# Altium PCB Rackmount_DSP.PcbDoc (part 3 of 24)
Units mil, origin at the board's own origin, x right, y up, seen from the top; angles counter-clockwise.
Board outline 10629.92 x 8267.72 mil, 4 copper layers (Top Layer, Mid Layer 1, Mid Layer 2, Bottom Layer), stack 36.2 mil thick; 4500 components, 1565 nets, 9765 pads, 3289 vias.
Unrouted connection lines stored in the file: 1.
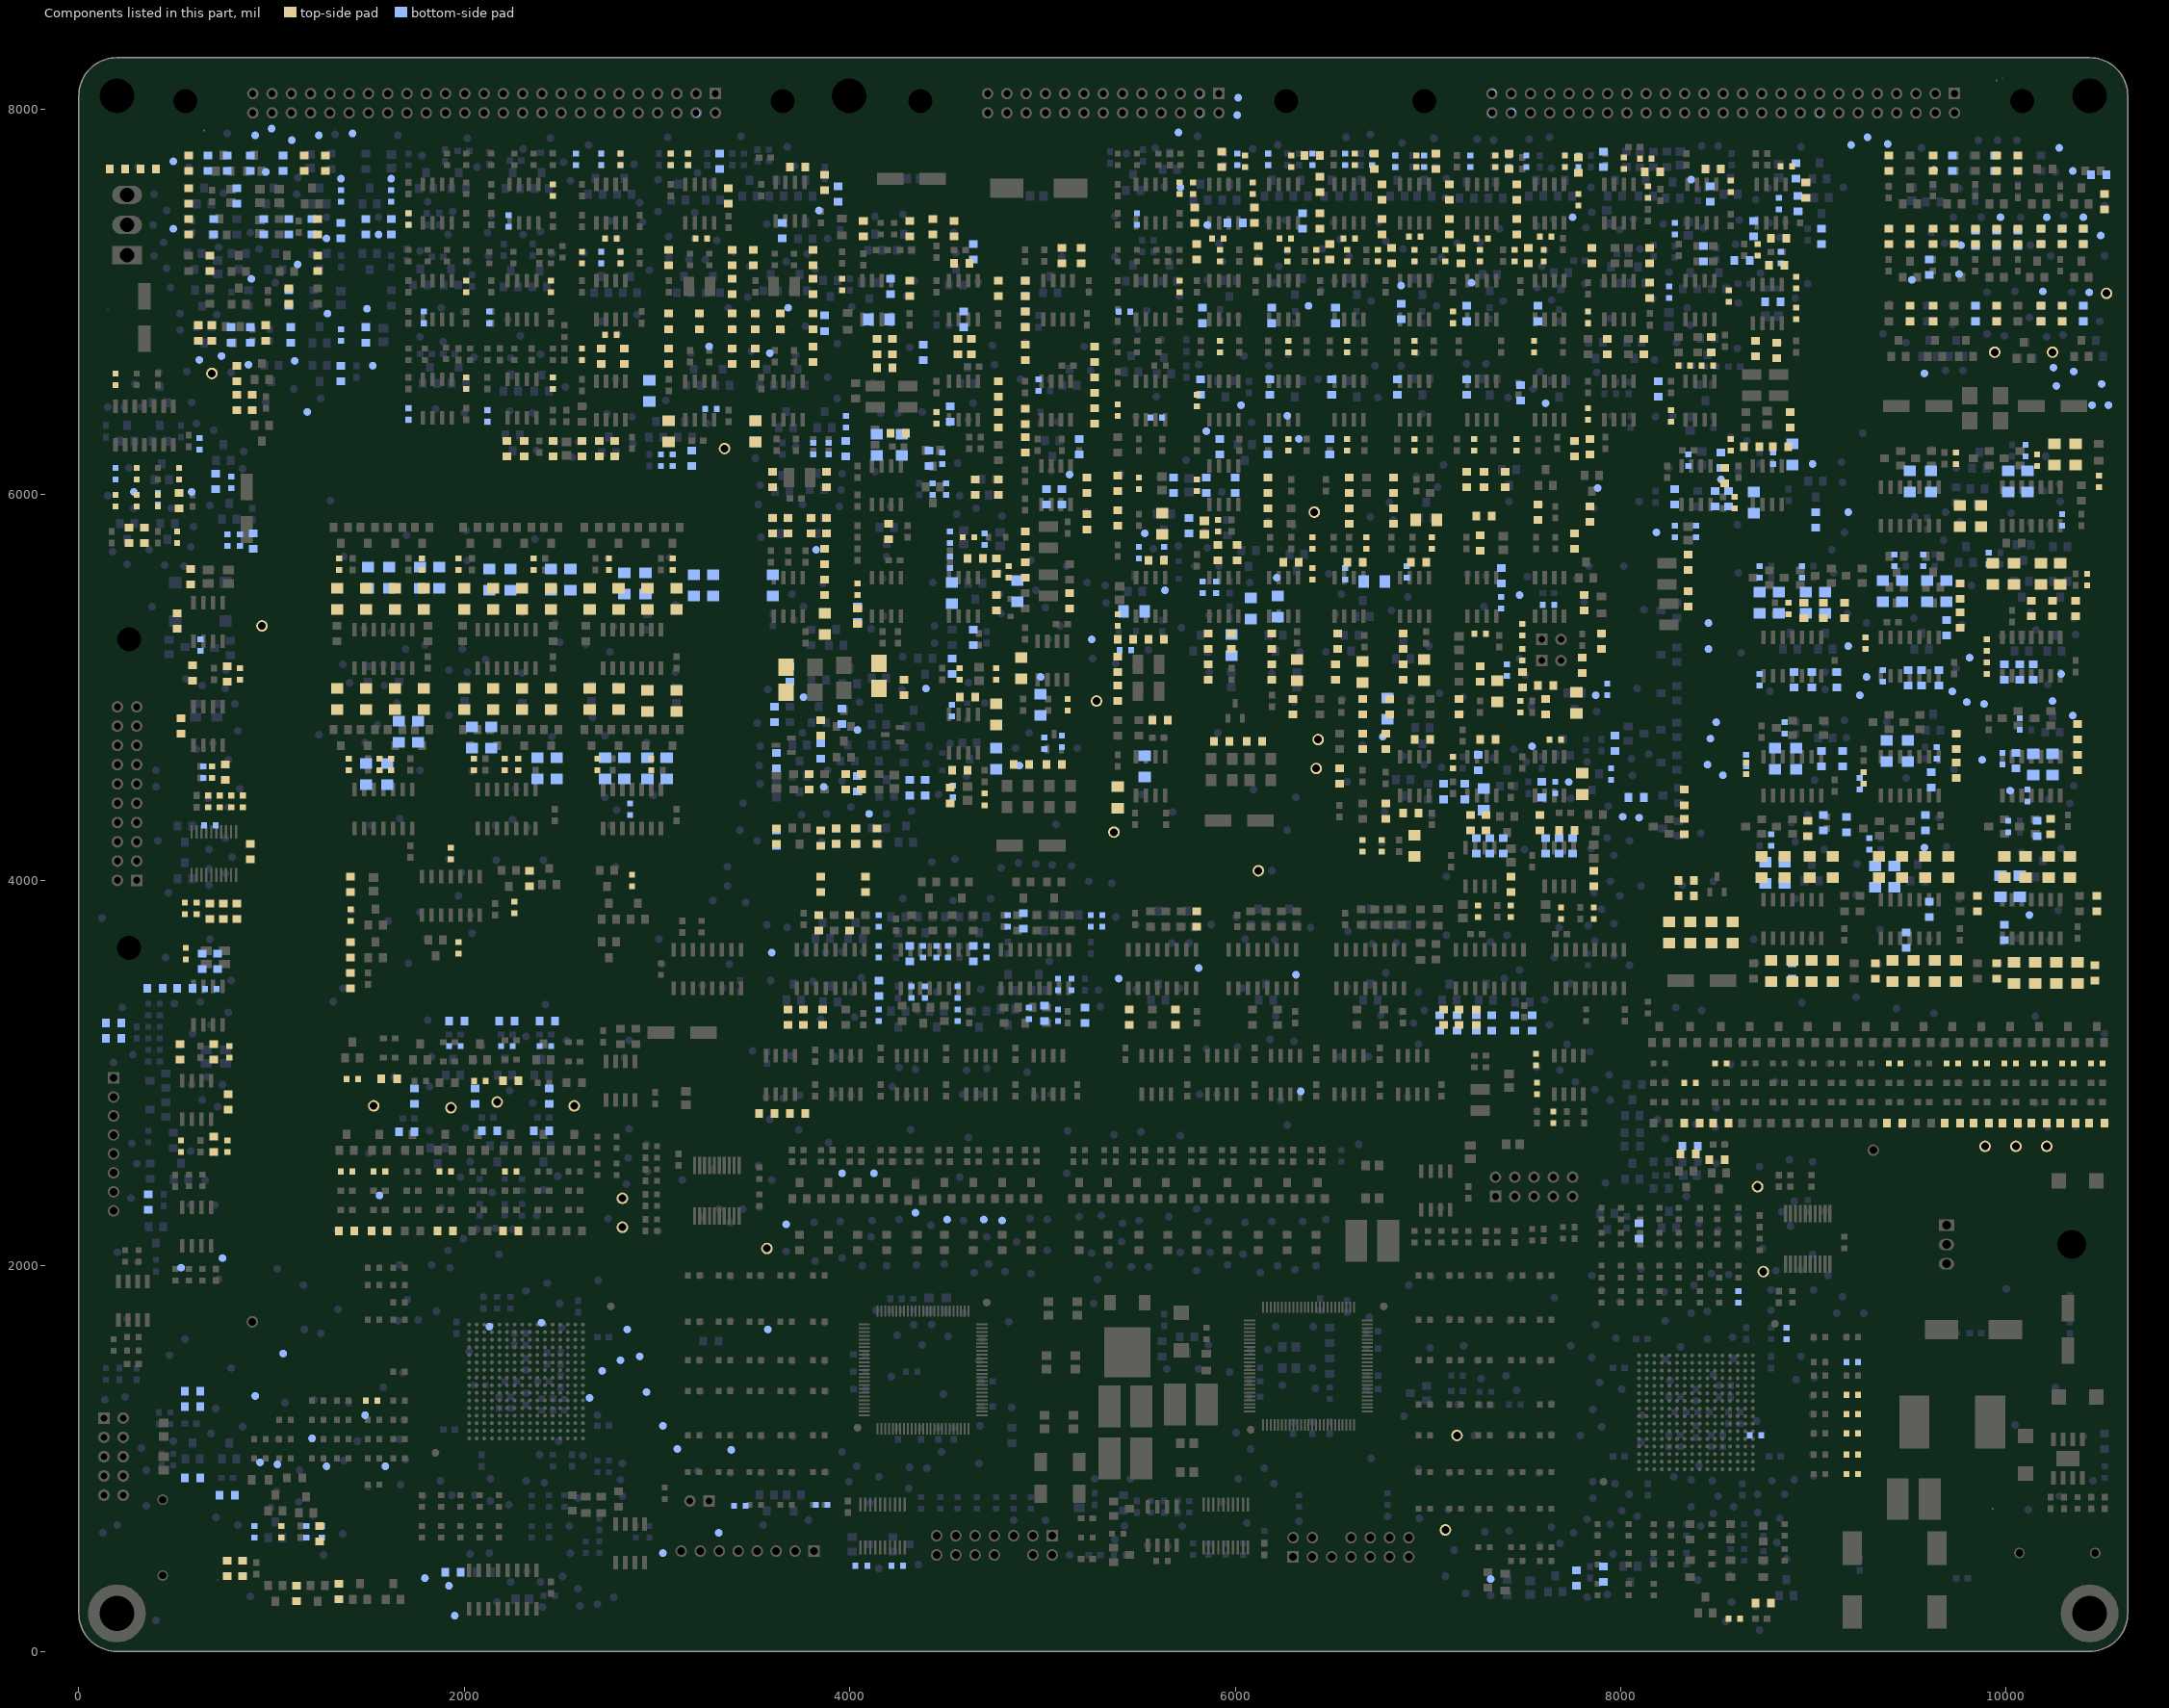
[diagram p5: the components of this part, seen from the top]

## Components (designator, comment, footprint, x,y, rotation, side; value= is the part's Value field where it differs from the comment) (continued)
R1218 "07090231" sr0805 3860,3290 r90 top
R1219 "07090231" sr0805 4080,3980 r90 top
R1220 "07090231" sr0805 3850,3980 r270 top
R1221 "07090231" sr0805 5690,3290 r90 top
R1222 "07090231" sr0805 5800,3800 r270 top
R1225 "07090534" sr0805 7330,3260 r90 bottom
R1226 "07090534" sr0805 7540,3260 r90 bottom
R1227 "07090534" sr0805 7150,3260 r90 bottom
R1231 "07090534" sr0805 10290,7340 r270 top
R1232 "07090534" sr0805 9620,7340 r270 top
R1233 "07090534" sr0805 10180,7340 r270 bottom
R1234 "07090534" sr0805 8350,2580 r180 top
R1235 "07090534" sr0805 7770,380 r270 bottom
R1236 "07090534" sr0805 1490,7390 r90 bottom
R1237 "07090534" sr0805 1100,6830 r90 bottom
R1238 "07090534" sr0805 1210,7390 r90 bottom
R1239 "07090534" sr0805 4280,5000 r90 top
R1240 "07090534" sr0805 3610,4860 r90 bottom
R1241 "07090534" sr0805 590,900 r180 bottom
R1242 "07090534" sr0805 6100,4720 r180 top
R1243 "07090534" sr0805 5930,4720 r180 top
R1244 "07090534" sr0805 5060,4600 r180 top
R1245 "07090534" sr0805 4890,4600 r180 top
R1246 "07090534" sr0805 6520,5080 r90 top
R1247 "07090534" sr0805 6590,5890 r270 top
R1248 "07090534" sr0805 5860,5240 r90 top
R1249 "07090534" sr0805 5910,5700 r270 top
R1250 "07090534" sr0805 7160,4900 r270 top
R1251 "07090534" sr0805 7080,4460 r270 bottom
R1252 "07090534" sr0805 6170,5890 r270 top
R1253 "07090534" sr0805 6190,5080 r90 top
R1254 "07090534" sr0805 6780,4720 r90 top
R1255 "07090534" sr0805 6780,4360 r270 top
R1256 "07090534" sr0805 5430,5250 r0 top
R1257 "07090534" sr0805 4760,5630 r270 top
R1262 "07090534" sr0805 4520,4440 r90 top
R1263 "07090534" sr0805 8490,5980 r270 bottom
R1264 "07090534" sr0805 8680,6250 r0 top
R1265 "07090534" sr0805 9840,7340 r270 top
R1266 "07090534" sr0805 9390,7340 r270 top
R1267 "07090534" sr0805 10400,7340 r270 bottom
R1268 "07090534" sr0805 9950,7330 r270 bottom
R1269 "07090534" sr0805 10060,7340 r270 top
R1272 "07090534" sr0805 3760,3290 r90 top
R1274 "07090534" sr0805 1170,7720 r270 top
R1276 "07090534" sr0805 5390,5880 r270 top
R1277 "07090534" sr0805 4770,6040 r270 top
R1278 "07090534" sr0805 4530,5110 r270 bottom
R1279 "07090534" sr0805 1350,310 r90 top
R1280 "07090534" sr0805 3960,4850 r90 bottom
R1281 "07090534" sr0805 8360,2620 r180 bottom
R1282 "07090534" sr0805 3690,5070 r90 bottom
R1283 "07090534" sr0805 590,1350 r0 bottom
R1285 "07090534" sr0805 1490,6830 r90 bottom
R1290 "07090534" sr0805 3930,4230 r270 top
R1291 "07090534" sr0805 6870,5080 r90 top
R1292 "07090534" sr0805 6820,5890 r270 top
R1299 "07090534" sr0805 3620,4220 r270 bottom
R1301 "07090534" sr0805 1240,7200 r270 top
R1302 "07090534" sr0805 1280,7720 r270 top
R1307 "07090549" sr0805 760,4560 r90 top
R1309 "07090549" sr0805 770,5070 r90 top
R1311 "07090549" sr0805 700,2630 r90 top
R1312 "07090549" sr0805 700,3110 r90 top
R1313 "07090581" sr0805 680,3840 r90 top
R1314 "07091130" sr0805 8480,7690 r0 top
R1315 "07091130" sr0805 8465,7560 r270 bottom
R1316 "07091130" sr0805 8630,7215 r180 bottom
R1317 "07091130" sr0805 8430,7250 r90 bottom
R1318 "07091137" SR0603 7565,2920 r270 top
R1319 "07091137" SR0603 7560,3070 r270 top
R1320 "07091137" SR0603 7650,2770 r90 top
R1345 "07090560" sr0805 1940,410 r0 bottom
R1346 "07090638" SR0603 685,3435 r0 bottom
R1348 "07090638" SR0603 680,4285 r180 bottom
R1349 "07090638" SR0603 630,5220 r270 bottom
R1350 "07090299" sr0805 180,3180 r180 bottom
R1351 "07090299" sr0805 180,3260 r180 bottom
R1352 "07090299" sr0805 640,3580 r90 bottom
R1353 "07090299" sr0805 720,3580 r90 bottom
R1354 "07090035" sr0805 7970,4710 r270 bottom
R1355 "07090035" sr0805 8330,4280 r90 top
R1356 "07090035" sr0805 2220,6240 r270 top
R1357 "07090035" sr0805 770,810 r180 bottom
R1358 "07090035" sr0805 8095,2180 r270 bottom
R1359 "07090035" sr0805 850,430 r270 top
R1360 "07090035" sr0805 9950,6940 r90 top
R1361 "07090035" sr0805 9500,6940 r90 top
R1362 "07090035" sr0805 10400,6940 r90 bottom
R1363 "07090035" sr0805 9840,6940 r90 bottom
R1364 "07090035" sr0805 10180,6940 r90 top
R1365 "07090035" sr0805 10290,6940 r90 top
R1366 "07090035" sr0805 9620,6940 r90 top
R1367 "07090035" sr0805 10180,6940 r90 bottom
R1369 "07090035" sr0805 9600,7180 r90 bottom
R1370 "07090035" sr0805 8500,2550 r180 top
R1371 "07090035" sr0805 7910,400 r270 bottom
R1372 "07090035" sr0805 1090,7030 r90 top
R1373 "07090035" sr0805 1240,7390 r90 top
R1374 "07090035" sr0805 1620,7390 r270 bottom
R1375 "07090035" sr0805 890,6830 r90 bottom
R1376 "07090035" sr0805 1360,7370 r90 bottom
R1377 "07090035" sr0805 1360,6630 r270 bottom
R1378 "07090035" sr0805 360,2330 r270 bottom
R1380 "07090035" sr0805 9950,7720 r270 top
R1381 "07090035" sr0805 9390,7720 r270 top
R1382 "07090035" sr0805 10480,7660 r180 bottom
R1383 "07090035" sr0805 9720,7720 r270 bottom
R1384 "07090035" sr0805 10060,7720 r270 top
R1385 "07090035" sr0805 10510,7520 r90 top
R1386 "07090035" sr0805 9620,7720 r270 top
R1387 "07090035" sr0805 9940,7720 r270 bottom
R1388 "07090035" sr0805 8960,7580 r270 top
R1389 "07090035" sr0805 10400,7340 r90 top
R1390 "07090035" sr0805 9730,7340 r90 top
R1391 "07090035" sr0805 10060,7330 r90 bottom
R1393 "07090035" sr0805 9950,7340 r90 top
R1394 "07090035" sr0805 9500,7340 r90 top
R1395 "07090035" sr0805 10290,7340 r90 bottom
R1396 "07090035" sr0805 9840,7330 r90 bottom
R1397 "07090035" sr0805 10180,7340 r90 top
R1398 "07090035" sr0805 8350,5460 r270 top
R1399 "07090035" sr0805 8810,6750 r270 top
R1401 "07090035" sr0805 7080,3290 r90 top
R1402 "07090555" sr0805 3980,4510 r90 top
R1403 "07090035" sr0805 3620,4620 r270 bottom
R1404 "07090035" sr0805 200,7690 r180 top
R1405 "07090035" sr0805 360,7690 r180 top
R1406 "07090035" sr0805 2780,6240 r270 top
R1412 "07090035" sr0805 9480,3690 r270 bottom
R1413 "07090035" sr0805 9610,4520 r270 bottom
R1414 "07090035" sr0805 8900,5040 r90 bottom
R1415 "07090035" sr0805 8950,5400 r90 top
R1416 "07090035" sr0805 8970,4270 r270 top
R1417 "07090035" sr0805 8890,3530 r270 bottom
R1420 "07090035" sr0805 10050,4620 r90 bottom
R1422 "07090035" sr0805 7900,5240 r270 top
R1423 "07090035" sr0805 770,430 r270 top
R1424 "07090072" sr1206 6930,4180 r270 top
R1425 "07090072" sr1206 6980,5090 r270 top
R1426 "07090072" sr1206 6990,5870 r180 top
R1427 "07090072" sr1206 5475,5395 r180 bottom
R1428 "07090072" sr1206 5620,5850 r90 top
R1429 "07090072" sr1206 4870,5500 r90 bottom
R1430 "07090072" sr1206 4530,5490 r270 bottom
R1432 "07090072" sr1206 4760,4860 r270 top
R1433 "07090072" sr1206 8690,5960 r270 bottom
R1434 "07090072" sr1206 8890,6210 r90 bottom
R1436 "07090035" sr0805 7160,3290 r90 top
R1438 "07090035" sr0805 3650,7370 r90 bottom
R1439 "07090072" sr1206 6660,5080 r270 top
R1440 "07090072" sr1206 6720,5550 r0 bottom
R1441 "07090072" sr1206 5980,5220 r270 bottom
R1442 "07090072" sr1206 6080,5410 r270 bottom
R1443 "07090072" sr1206 7360,4980 r90 top
R1444 "07090072" sr1206 7290,4420 r270 bottom
R1445 "07090072" sr1206 6220,5420 r270 bottom
R1446 "07090072" sr1206 6320,5090 r270 top
R1447 "07090072" sr1206 6790,4890 r90 bottom
R1448 "07090035" sr0805 8330,4430 r90 top
R1449 "07090035" sr0805 8350,5650 r270 top
R1450 "07090035" sr0805 8700,6760 r270 top
R1451 "07090030" sr1206 7770,4920 r90 top
R1452 "07090030" sr1206 7800,4500 r270 top
R1453 "07090889" SR0603 7930,4990 r270 bottom
R1454 "07090035" sr0805 7810,5440 r270 top
R1455 "07090035" sr0805 7840,5900 r270 top
R1456 "07090035" sr0805 4060,4510 r270 top
R1457 "07090035" sr0805 3790,4510 r270 top
R1458 "07090889" SR0603 7950,4550 r270 bottom
R1459 "07090035" sr0805 2460,6240 r90 top
R1460 "07090035" sr0805 2310,6240 r90 top
R1461 "07090035" sr0805 3870,6890 r270 bottom
R1464 "07090035" sr0805 5450,3290 r90 top
R1465 "07090035" sr0805 7840,6250 r270 top
R1468 "07090035" sr0805 7250,3290 r90 top
R1474 "07090035" sr0805 5920,6250 r90 bottom
R1475 "07090035" sr0805 7270,5750 r90 top
R1478 "07090786" SR0603 8700,1120 r180 bottom
R1479 "07090786" SR0603 190,5970 r90 top
R1480 "07090786" SR0603 300,5970 r90 top
R1481 "07090786" SR0603 410,5980 r90 bottom
R1482 "07090947" SR0603 520,6110 r90 top
R1483 "07090947" SR0603 510,5780 r90 top
R1484 "07090947" SR0603 300,6110 r90 top
R1485 "07090449" sr0805 520,5970 r90 top
R1486 "07090449" sr0805 340,5790 r270 top
R1487 "07090449" sr0805 260,5790 r270 top
R1488 "07090449" sr0805 8150,7060 r270 top
R1489 "07090449" sr0805 7760,6240 r270 top
R1490 "07090449" sr0805 3870,7620 r270 top
R1491 "07090449" sr0805 4310,7070 r270 top
R1492 "07090758" SR0603 410,5970 r270 top
R1493 "07090758" SR0603 190,6110 r90 bottom
R1494 "07090758" SR0603 190,6600 r270 top
R1497 "07091137" SR0603 5390,6440 r270 top
R1498 "07091137" SR0603 1710,6420 r270 bottom
R1499 "07091137" SR0603 1790,6920 r270 bottom
R1500 "07091137" SR0603 1710,7430 r270 bottom
R1501 "07091137" SR0603 2460,6580 r270 top
R1502 "07091137" SR0603 2450,7080 r270 top
R1503 "07091137" SR0603 2460,7580 r270 top
R1522 "07091137" SR0603 5710,7590 r270 top
R1523 "07091137" SR0603 5425,6950 r180 bottom
R1535 "07091137" SR0603 8570,7600 r270 top
R1536 "07091137" SR0603 8560,7030 r270 top
R1537 "07091137" SR0603 7830,6920 r270 top
R1538 "07091137" SR0603 7830,6420 r270 top
R1546 "07091137" SR0603 7270,5280 r0 top
R1547 "07091137" SR0603 5910,5840 r270 top
R1548 "07091137" SR0603 5490,7430 r270 bottom
R1549 "07091137" SR0603 5710,7080 r270 top
R1564 "07091137" SR0603 8250,7050 r90 bottom
R1567 "07091137" SR0603 2010,6580 r270 top
R1568 "07091137" SR0603 2010,7080 r270 top
R1569 "07091137" SR0603 1710,7430 r270 top
R1570 "07091137" SR0603 2120,6410 r270 bottom
R1571 "07091137" SR0603 2130,6920 r270 bottom
R1575 "07091137" SR0603 7380,5440 r270 bottom
R1576 "07091137" SR0603 5800,6050 r270 top
R1577 "07091137" SR0603 5590,6400 r0 bottom
R1578 "07091137" SR0603 2230,7420 r270 bottom
R1579 "07091137" SR0603 8280,7380 r270 bottom
R1596 "07090700" SR0603 3160,7740 r270 bottom
R1597 "07090700" SR0603 2810,7740 r270 bottom
R1598 "07090700" SR0603 2810,7230 r270 bottom
R1599 "07090700" SR0603 3070,7740 r270 bottom
R1600 "07090700" SR0603 2710,7740 r270 bottom
R1601 "07090700" SR0603 2710,7230 r270 bottom
R1602 "07090758" SR0603 8260,6410 r270 top
R1603 "07090758" SR0603 8140,7570 r270 top
R1604 "07091138" SR0603 8450,6670 r0 top
R1605 "07091138" SR0603 8330,6670 r180 top
R1606 "07091138" SR0603 8130,7745 r180 top
R1607 "07091138" SR0603 8015,7720 r90 top
R1608 "07090097" sr0805 2610,6240 r270 top
R1611 "07090097" sr0805 7760,5760 r270 top
R1612 "07090097" sr0805 7570,5910 r90 top
R1613 "07090097" sr0805 4210,7080 r90 bottom
R1614 "07090097" sr0805 3940,7560 r270 bottom
R1615 "07090097" sr0805 5590,5250 r0 top
R1616 "07090097" sr0805 5590,5660 r0 top
R1617 "07090097" sr0805 4760,5440 r270 top
R1618 "07090097" sr0805 4650,5670 r0 top
R1619 "07090097" sr0805 4570,4570 r0 top
R1620 "07090097" sr0805 4610,4950 r0 top
R1621 "07090097" sr0805 8560,5980 r90 bottom
R1622 "07090097" sr0805 8830,6250 r0 top
R1623 "07090233" sr0805 5980,5240 r90 top
R1624 "07090233" sr0805 6010,5700 r270 top
R1627 "07090097" sr0805 3870,5680 r270 top
R1628 "07090097" sr0805 3870,5520 r270 top
R1629 "07090097" sr0805 3800,5840 r270 top
R1630 "07090097" sr0805 3810,6900 r270 top
R1631 "07090097" sr0805 3810,6730 r270 top
R1632 "07090097" sr0805 3220,6900 r90 top
R1633 "07090097" sr0805 3060,6900 r270 top
R1634 "07090097" sr0805 7610,4900 r270 top
R1635 "07090097" sr0805 7590,4470 r270 bottom
R1636 "07090097" sr0805 3880,6080 r270 top
R1637 "07090097" sr0805 3640,6900 r270 top
R1638 "07090097" sr0805 3810,7230 r270 top
R1639 "07090097" sr0805 3390,6720 r270 top
R1640 "07090097" sr0805 3060,7230 r270 top
R1641 "07090097" sr0805 3390,7230 r270 top
R1642 "07090097" sr0805 3680,5840 r90 top
R1643 "07090097" sr0805 680,7200 r90 top
R1644 "07090097" sr0805 3600,6080 r270 top
R1645 "07090097" sr0805 3510,6900 r90 top
R1646 "07090097" sr0805 3500,7230 r270 top
R1647 "07090233" sr0805 6910,4350 r0 top
R1648 "07090233" sr0805 6870,5240 r90 top
R1649 "07090233" sr0805 6950,5650 r0 top
R1650 "07090233" sr0805 7310,4730 r0 top
R1651 "07090233" sr0805 7190,4460 r90 bottom
R1652 "07090233" sr0805 6290,5650 r0 top
R1653 "07090233" sr0805 6190,5240 r270 top
R1654 "07090233" sr0805 6970,4730 r0 top
R1655 "07090233" sr0805 6530,5240 r270 top
R1656 "07090233" sr0805 6620,5650 r0 top
R1658 "07090097" sr0805 3390,6900 r270 top
R1661 "07090624" SR0603 3960,7090 r90 top
R1668 "07090458" sr0805 3680,3290 r90 top
R1669 "07090458" sr0805 4310,7380 r270 top
R1670 "07090458" sr0805 4070,7380 r90 top
R1671 "07090458" sr0805 3730,7700 r0 top
R1672 "07090458" sr0805 3325,7730 r90 bottom
R1674 "07090458" sr0805 6800,4900 r90 top
R1675 "07090458" sr0805 6820,6050 r270 top
R1676 "07090458" sr0805 6660,4900 r90 top
R1677 "07090458" sr0805 6590,6050 r270 top
R1678 "07090458" sr0805 5860,5080 r90 top
R1679 "07090458" sr0805 5760,5840 r270 bottom
R1680 "07090458" sr0805 7270,5070 r270 top
R1681 "07090458" sr0805 7260,4610 r270 bottom
R1682 "07090458" sr0805 6170,6050 r270 top
R1683 "07090458" sr0805 6300,4900 r90 top
R1684 "07090458" sr0805 6660,4720 r270 top
R1685 "07090458" sr0805 6540,4540 r270 top
R1686 "07090458" sr0805 8520,6180 r270 bottom
R1687 "07090458" sr0805 8880,6390 r270 top
R1690 "07090458" sr0805 7250,3260 r270 bottom
R1691 "07090458" sr0805 7450,3260 r270 bottom
R1692 "07090458" sr0805 7060,3260 r270 bottom
R1694 "07090458" sr0805 5390,6060 r90 top
R1695 "07090458" sr0805 4650,6040 r270 top
R1696 "07090458" sr0805 4640,5260 r270 bottom
R1697 "07090096" sr1206 4150,6910 r180 bottom
R1701 "07090780" sr0805 5270,6410 r270 top
R1719 "07090780" sr0805 2830,6720 r270 top
R1723 "07090780" sr0805 8820,7330 r0 top
R1724 "07090780" sr0805 8690,7380 r90 bottom
R1728 "07090780" sr0805 4910,6407 r90 top
R1743 "07090780" sr0805 2710,6720 r90 top
R1774 "07090887" SR0603 5500,6060 r90 top
R1775 "07090887" SR0603 4520,5780 r90 bottom
R1776 "07090887" SR0603 4760,5070 r90 top
R1777 "07090887" SR0603 5390,5350 r270 top
R1778 "07090887" SR0603 4700,5770 r90 bottom
R1779 "07090887" SR0603 4700,4420 r90 top
R1812 "07090758" SR0603 5130,4910 r90 top
R1813 "07090758" SR0603 5100,4720 r90 bottom
R1814 "07090758" SR0603 5010,4710 r270 bottom
R1819 "07090514" sr0805 3600,5840 r270 top
R1820 "07090514" sr0805 3810,7080 r270 top
R1821 "07090514" sr0805 3510,6720 r270 top
R1822 "07090514" sr0805 3060,6720 r270 top
R1823 "07090514" sr0805 3390,7080 r270 top
R1824 "07090514" sr0805 3880,5840 r270 top
R1825 "07090514" sr0805 2700,6240 r90 top
R1826 "07090717" SR0603 8650,4580 r270 top
R1827 "07090717" SR0603 8720,5040 r90 bottom
R1828 "07090717" SR0603 8870,5410 r270 top
R1829 "07090717" SR0603 9900,5220 r270 top
R1830 "07090717" SR0603 9900,5100 r90 top
R1831 "07090717" SR0603 10110,4440 r90 bottom
R1832 "07090717" SR0603 9980,4630 r90 bottom
R1833 "07090717" SR0603 9240,4500 r270 bottom
R1834 "07090717" SR0603 9260,4530 r90 top
R1835 "07090717" SR0603 8650,4620 r270 bottom
R1836 "07090514" sr0805 3850,4790 r270 top
R1837 "07090717" SR0603 9360,5060 r270 bottom
R1838 "07090717" SR0603 9270,5230 r270 top
R1839 "07090514" sr0805 9010,5870 r90 bottom
R1840 "07090514" sr0805 3850,4670 r90 bottom
R1841 "07090573" sr1206 3510,6330 r90 top
R1842 "07090573" sr1206 3060,6330 r90 top
R1843 "07090573" sr1206 3600,5530 r90 bottom
R1844 "07090573" sr1206 5390,4430 r270 top
R1845 "07090573" sr1206 4890,5100 r270 top
R1846 "07090573" sr1206 4270,6260 r270 bottom
R1847 "07090573" sr1206 3870,5330 r90 top
R1848 "07090573" sr1206 3510,6330 r90 bottom
R1849 "07090573" sr1206 2960,6540 r90 bottom
R1850 "07090573" sr1206 5530,4590 r90 bottom
R1851 "07090573" sr1206 4990,4910 r270 bottom
R1852 "07090573" sr1206 4140,6260 r90 bottom
R1853 "07090154" sr0805 5390,4970 r270 top
R1854 "07090154" sr0805 4910,5610 r270 top
R1855 "07090154" sr0805 4180,6660 r180 top
R1856 "07090154" sr0805 5390,5120 r270 top
R1857 "07090154" sr0805 4910,5770 r270 top
R1858 "07090154" sr0805 4380,6740 r270 bottom
R1859 "07090556" sr0805 5610,4830 r0 top
R1860 "07090556" sr0805 5140,5450 r270 top
R1861 "07090556" sr0805 4250,6320 r0 top
R1864 "07090040" sr1206 9740,3530 r90 top
R1865 "07090040" sr1206 9460,4070 r270 top
R1866 "07090040" sr1206 2950,5460 r270 top
R1867 "07090040" sr1206 2000,4940 r90 top
R1868 "07090040" sr1206 2450,4940 r90 top
R1869 "07090040" sr1206 2800,5460 r270 top
R1870 "07090040" sr1206 9100,4070 r270 top
R1871 "07090040" sr1206 8780,3530 r90 top
R1872 "07090040" sr1206 8850,4070 r270 top
R1873 "07090040" sr1206 9100,3530 r90 top
R1874 "07090040" sr1206 2300,5460 r270 top
R1875 "07090040" sr1206 1790,5460 r270 top
R1876 "07090040" sr1206 1790,4940 r90 top
R1877 "07090040" sr1206 3100,4930 r90 top
R1878 "07090040" sr1206 1490,4940 r90 top
R1879 "07090040" sr1206 2000,5460 r270 top
R1882 "07090040" sr1206 10100,4070 r270 top
R1896 "07090040" sr1206 10250,6210 r270 top
R1897 "07090040" sr1206 10360,6210 r270 top
R1898 "07090040" sr1206 9760,5890 r270 top
R1899 "07090040" sr1206 9870,5890 r270 top
R1900 "07090040" sr1206 2450,5460 r270 top
R1901 "07090040" sr1206 1640,4940 r90 top
R1902 "07090040" sr1206 2800,4940 r90 top
R1903 "07090040" sr1206 2650,4940 r90 top
R1904 "07090040" sr1206 1490,5460 r270 top
R1905 "07090040" sr1206 1340,5460 r270 top
R1906 "07090040" sr1206 2150,4940 r90 top
R1907 "07090040" sr1206 2300,4940 r90 top
R1908 "07090040" sr1206 2650,5460 r270 top
R1909 "07090040" sr1206 8980,4070 r270 top
R1910 "07090040" sr1206 8890,3530 r90 top
R1911 "07090040" sr1206 8730,4070 r270 top
R1912 "07090040" sr1206 8990,3530 r90 top
R1913 "07090040" sr1206 1640,5460 r270 top
R1914 "07090040" sr1206 2950,4930 r90 top
R1915 "07090040" sr1206 1340,4940 r90 top
R1916 "07090040" sr1206 2150,5460 r270 top
R1919 "07090040" sr1206 9630,3530 r90 top
R1920 "07090040" sr1206 9340,4070 r270 top
R1921 "07090040" sr1206 3100,5460 r270 top
R1924 "07090040" sr1206 9990,4070 r270 top
R1938 "07090727" SR0603 8790,6190 r90 bottom
R1946 "07090717" SR0603 2870,4000 r90 top
R1948 "07091130" sr0805 7400,6080 r270 top
R1949 "07091130" sr0805 6490,6250 r90 bottom
R1950 "07091130" sr0805 7200,6080 r270 top
R1951 "07091130" sr0805 6000,6050 r90 bottom
R1952 "07091130" sr0805 7290,6080 r270 top
R1953 "07091130" sr0805 6170,6250 r90 bottom
R1954 "07091130" sr0805 7290,5890 r0 top
R1955 "07091130" sr0805 5850,6050 r90 bottom
R1956 "07090890" SR0603 8520,3050 r180 top
R1957 "07090890" SR0603 9420,3050 r180 top
R1958 "07090890" SR0603 10020,3050 r180 top
R1959 "07090890" SR0603 10170,3050 r180 top
R1960 "07090890" SR0603 9870,3050 r180 top
R1961 "07090890" SR0603 9720,3050 r180 top
R1962 "07090890" SR0603 10320,3050 r180 top
R1963 "07090890" SR0603 10470,3050 r180 top
R1964 "07090890" SR0603 2080,2960 r180 top
R1965 "07090890" SR0603 2240,2490 r180 top
R1966 "07090890" SR0603 1900,2490 r180 top
R1967 "07090890" SR0603 1560,2490 r180 top
R1968 "07090890" SR0603 1420,2970 r180 top
R1969 "07090890" SR0603 1390,2490 r180 top
R1970 "07090554" sr0805 1560,2180 r180 top
R1971 "07090554" sr0805 1390,2180 r180 top
R1972 "07090554" sr0805 2240,2180 r180 top
R1973 "07090554" sr0805 10020,2740 r180 top
R1974 "07090554" sr0805 10170,2740 r180 top
R1975 "07090554" sr0805 10470,2740 r180 top
R1976 "07090554" sr0805 10320,2740 r180 top
R1977 "07090554" sr0805 1900,2180 r180 top
R1978 "07090554" sr0805 9720,2740 r180 top
R1979 "07090554" sr0805 8520,2740 r180 top
R1980 "07090554" sr0805 9420,2740 r180 top
R1981 "07090554" sr0805 1610,2970 r0 top
R1982 "07090554" sr0805 2240,2960 r180 top
R1983 "07090554" sr0805 9870,2740 r180 top
R1987 "07091130" sr0805 8150,7240 r270 top
R1988 "07091130" sr0805 7850,7240 r90 top
R1989 "07091130" sr0805 8120,6770 r270 top
R1990 "07091130" sr0805 7930,6770 r90 top
R2026 "07090700" SR0603 1050,620 r90 top
R2027 "07090700" SR0603 8590,170 r0 top
R2037 "07090035" sr0805 1250,610 r270 top
R2038 "07090035" sr0805 8740,250 r0 top
R2041 "07090777" SR0603 6580,6260 r270 top
R2042 "07090777" SR0603 6274.92,6260 r270 top
R2043 "07090777" SR0603 5800,6490 r270 top
R2054 "07090758" SR0603 5500,5700 r90 bottom
R2055 "07090758" SR0603 4520,5650 r90 bottom
R2056 "07090758" SR0603 4570,5070 r270 top
R2063 "07090776" SR0603 7480,4900 r270 top
R2064 "07090776" SR0603 6400,5590 r90 top
R2065 "07090776" SR0603 6890,5600 r270 bottom
R2066 "07090776" SR0603 6660,4180 r90 top
R2067 "07090776" SR0603 6570,5590 r270 bottom
R2068 "07090776" SR0603 5830,5520 r90 bottom
R2069 "07090522" SR0603 8590,5960 r90 top
R2078 "07090758" SR0603 10480,6070 r270 top
R2081 "07090752" SR0603 7660,4730 r0 top
R2082 "07090752" SR0603 7660,4480 r90 bottom
R2083 "07090565" sr0805 7490,5040 r90 top
R2087 "08070612" SC0805 5840,5830 r90 top
R2088 "08020059" STC3528 3670,5040 r270 top
R2089 "08020059" STC3528 4150,5060 r90 top
R2092 "07090534" sr0805 8340,3920 r0 top
R2093 "07090534" sr0805 8340,4000 r180 top
R2094 "07090033" sr1206 8250,3730 r90 top
R2095 "07090033" sr1206 8360,3730 r90 top
R2096 "07090033" sr1206 8470,3730 r90 top
R2097 "07090033" sr1206 8580,3730 r90 top
R2098 "07090890" SR0603 1260,620 r270 bottom
R2099 "07090686" SR0603 1180,620 r270 bottom
R2100 "07090686" SR0603 9200,1020 r0 top
R2101 "07090686" SR0603 9200,1230 r0 top
R2102 "07090686" SR0603 9200,1330 r0 top
R2103 "07090686" SR0603 9200,920 r0 top
R2104 "07090686" SR0603 9200,1130 r0 top
R2105 "07090686" SR0603 9200,1500 r0 bottom
R2106 "07090686" SR0603 8860,1650 r90 bottom
R2107 "07090686" SR0603 8610,1840 r270 bottom
R2108 "07090686" SR0603 1620,7550 r90 bottom
R2109 "07090686" SR0603 1360,6830 r90 bottom
R2110 "07090686" SR0603 1360,7550 r270 bottom
R2111 "07090601" SR0603 910,620 r270 bottom
R2112 "07090554" sr0805 9050,4300 r90 bottom
R2113 "07090554" sr0805 9040,4630 r270 bottom
R2114 "07090554" sr0805 10360,5410 r270 top
R2115 "07090554" sr0805 10140,5080 r270 bottom
R2116 "07090554" sr0805 10230,4280 r90 top
R2117 "07090554" sr0805 10370,4610 r270 top
R2118 "07090554" sr0805 9650,5050 r90 bottom
R2119 "07090554" sr0805 9760,5350 r270 top
R2120 "07090554" sr0805 9580,4300 r90 bottom
R2121 "07090554" sr0805 9740,4570 r270 top
R2122 "07090554" sr0805 8990,5040 r270 bottom
R2123 "07090554" sr0805 9050,5400 r270 top
R2199 "07090231" sr0805 4390,4480 r90 bottom
R2200 "07090231" sr0805 590,1270 r180 bottom
R2201 "07090231" sr0805 10470,3880 r90 top
R2202 "07090231" sr0805 10460,3520 r90 top
R2203 "07090231" sr0805 9850,3880 r90 top
R2204 "07090231" sr0805 9950,3530 r90 top
R2205 "07090231" sr0805 9320,3530 r90 top
R2206 "07090231" sr0805 670,7720 r270 bottom
R2208 "07090534" sr0805 9170,4290 r270 bottom
R2209 "07090534" sr0805 9150,4630 r90 bottom
R2210 "07090534" sr0805 10240,5410 r270 top
R2211 "07090534" sr0805 10070,5080 r90 bottom
R2212 "07090534" sr0805 10160,4270 r270 bottom
R2213 "07090534" sr0805 10370,4770 r270 top
R2214 "07090534" sr0805 9560,5050 r270 bottom
R2215 "07090534" sr0805 9760,5500 r270 top
R2216 "07090534" sr0805 9600,3850 r90 bottom
R2217 "07090534" sr0805 9740,4720 r270 top
R2218 "07090534" sr0805 9120,5040 r90 bottom
R2219 "07090534" sr0805 9160,5400 r270 top
R2220 "07090534" sr0805 4030,4230 r270 top
R2221 "07090534" sr0805 4030,4230 r90 bottom
R2222 "07090534" sr0805 1130,300 r90 top
R2223 "07090534" sr0805 4140,4230 r270 top
R2224 "07090534" sr0805 570,7390 r270 top
R2225 "07090534" sr0805 570,7550 r90 top
R2227 "07090534" sr0805 770,7720 r90 bottom
R2228 "07090534" sr0805 820,7550 r90 bottom
R2229 "07090779" sr0805 8280,5990 r270 bottom
R2230 "07091137" SR0603 8350,6180 r270 bottom
R2231 "07091137" SR0603 6590,7330 r0 top
R2232 "07090884" SR0603 6570,7740 r270 bottom
R2233 "07091137" SR0603 6260,7330 r0 top
R2234 "07090884" SR0603 6170,7740 r270 bottom
R2235 "07091137" SR0603 5910,7330 r0 top
R2236 "07090884" SR0603 5780,7590 r270 top
R2237 "07090884" SR0603 6710,7740 r270 bottom
R2238 "07090884" SR0603 7510,7730 r270 bottom
R2239 "07090884" SR0603 7220,7730 r270 bottom
R2240 "07090884" SR0603 6830,7730 r270 bottom
R2241 "07090884" SR0603 6980,7730 r270 bottom
R2242 "07090884" SR0603 7420,7730 r270 bottom
R2243 "07090884" SR0603 7780,7730 r270 bottom
R2244 "07090884" SR0603 6010,7740 r270 bottom
R2245 "07090884" SR0603 6400,7740 r270 bottom
R2246 "07091137" SR0603 6620,7740 r270 top
R2247 "07091137" SR0603 6740,7240 r270 top
R2248 "07091137" SR0603 7610,7340 r0 top
R2249 "07091137" SR0603 7600,7240 r270 top
R2250 "07091137" SR0603 7280,7330 r0 top
R2251 "07091137" SR0603 7270,7240 r270 top
R2252 "07091137" SR0603 7090,7240 r270 top
R2253 "07091137" SR0603 6940,7730 r270 top
R2254 "07091137" SR0603 6930,7340 r0 top
R2255 "07091137" SR0603 6930,7240 r270 top
R2256 "07091137" SR0603 7450,7240 r270 top
R2257 "07091137" SR0603 7350,7730 r270 top
R2258 "07091137" SR0603 7710,7730 r270 top
R2259 "07091137" SR0603 7780,7530 r270 top
R2260 "07091137" SR0603 6050,7730 r270 top
R2261 "07091137" SR0603 6090,7590 r270 top
R2262 "07091137" SR0603 6290,7730 r270 top
R2263 "07091137" SR0603 6420,7240 r270 top
R2264 "07090700" SR0603 8710,7270 r270 top
R2265 "07090534" sr0805 4430,7390 r270 top
R2266 "07090534" sr0805 5100,7240 r270 top
R2267 "07090534" sr0805 4910,6260 r270 top
R2268 "07091137" SR0603 6580,7240 r270 top
R2269 "07091137" SR0603 6270,7240 r270 top
R2270 "07091137" SR0603 5920,7240 r270 top
R2271 "07090700" SR0603 8570,6260 r270 top
R2272 "07091137" SR0603 8280,5810 r270 bottom
R2273 "07091137" SR0603 8910,7100 r270 top
R2274 "07091137" SR0603 8830,7230 r90 bottom
R2275 "07090779" sr0805 8810,7190 r0 top
R2276 "07090035" sr0805 10130,5410 r90 top
R2277 "07090035" sr0805 9990,5080 r90 bottom
R2278 "07090035" sr0805 9990,3730 r90 bottom
R2279 "07090035" sr0805 9490,5050 r90 bottom
R2280 "07090035" sr0805 9690,5310 r270 bottom
R2281 "07090035" sr0805 700,7390 r90 bottom
R2285 "07090035" sr0805 570,7720 r90 top
R2287 "07090696" SR0603 5900,5520 r270 bottom
R2288 "07090696" SR0603 7130,4610 r90 top
R2289 "07090758" SR0603 2610,6730 r90 top
R2290 "07090696" SR0603 6760,4180 r270 top
R2291 "07090696" SR0603 7020,5750 r90 top
R2292 "07090696" SR0603 6680,5750 r90 top
R2293 "07090696" SR0603 6400,5750 r90 top
R2294 "07090780" sr0805 4040,5380 r90 bottom
R2295 "07090780" sr0805 4040,5370 r270 top
R2296 "07090780" sr0805 4220,6770 r270 top
R2297 "07090780" sr0805 4140,6770 r270 top
R2298 "07090780" sr0805 4520,6420 r270 bottom
R2299 "07090780" sr0805 4770,6390 r270 top
R2300 "07090780" sr0805 4630,6770 r270 top
R2301 "07090780" sr0805 4560,6770 r270 top
R2302 "07090780" sr0805 4910,6910 r90 bottom
R2303 "07090780" sr0805 4910,6910 r270 top
R2304 "07090780" sr0805 5200,7240 r270 top
R2305 "07090780" sr0805 4540,7380 r270 top
R2306 "07090780" sr0805 4770,7070 r270 top
R2307 "07090780" sr0805 4590,6910 r90 bottom
R2308 "07090780" sr0805 4910,6740 r270 top
R2309 "07090780" sr0805 5270,6730 r270 top
R2310 "07090780" sr0805 5100,5990 r270 bottom
R2311 "07090780" sr0805 5230,5860 r90 top
R2312 "07090780" sr0805 5020,5990 r90 bottom
R2313 "07090040" sr1206 10330,4070 r270 top
R2314 "07090040" sr1206 10220,4070 r270 top
R2315 "07090040" sr1206 10260,3520 r90 top
R2316 "07090040" sr1206 10370,3520 r90 top
R2317 "07090040" sr1206 9700,4070 r270 top
R2318 "07090040" sr1206 9580,4070 r270 top
R2319 "07090040" sr1206 10040,3520 r90 top
R2320 "07090040" sr1206 10150,3520 r90 top
R2321 "07090040" sr1206 9520,3530 r90 top
R2322 "07090040" sr1206 9410,3530 r90 top
R2323 "07090514" sr0805 4310,4480 r270 bottom
R2324 "07091130" sr0805 7520,7240 r270 top
R2325 "07091130" sr0805 7170,7240 r270 top
R2326 "07091130" sr0805 6810,7240 r270 top
R2327 "07091130" sr0805 7040,7730 r270 top
R2328 "07091130" sr0805 7420,7730 r270 top
R2329 "07091130" sr0805 7780,7710 r270 top
R2330 "07091130" sr0805 6720,7730 r270 top
R2331 "07091130" sr0805 6400,7760 r0 top
R2332 "07091130" sr0805 5930,7740 r90 top
R2333 "07091130" sr0805 6490,7260 r270 top
R2334 "07091130" sr0805 6120,7250 r270 top
R2335 "07091130" sr0805 5800,7260 r270 top
R2336 "07090263" SR0603 3160,7740 r90 top
R2337 "07090263" SR0603 2810,7740 r90 top
R2338 "07090263" SR0603 2810,7230 r90 top
R2339 "07090263" SR0603 3070,7740 r90 top
R2340 "07090263" SR0603 2580,7740 r90 bottom
R2341 "07090263" SR0603 2610,7230 r90 top
R2342 "07090985" SR0603 7490,5300 r90 top
R2343 "07090033" sr1206 2130,5560 r90 bottom
R2344 "07090033" sr1206 2550,5560 r90 bottom
R2347 "07090033" sr1206 2730,4580 r90 bottom
R2348 "07090033" sr1206 1500,5570 r90 bottom
R2349 "07090033" sr1206 1870,5570 r90 bottom
R2350 "07090033" sr1206 2950,4580 r90 bottom
R2351 "07090033" sr1206 2940,5540 r90 bottom
R2352 "07090033" sr1206 2140,4740 r270 bottom
R2353 "07090033" sr1206 2380,4580 r90 bottom
R2354 "07090033" sr1206 3290,5530 r90 bottom
R2355 "07090717" SR0603 1970,3650 r90 top
R2356 "07090717" SR0603 2260,3860 r270 top
R2371 "07090779" sr0805 5270,6570 r270 top
R2372 "07090779" sr0805 4770,6550 r270 top
R2373 "07090779" sr0805 4200,5810 r270 top
R2374 "07090641" SR0603 4040,5510 r90 top
R2375 "07090641" SR0603 4980,6570 r90 bottom
R2376 "07090641" SR0603 4450,6400 r90 top
R2377 "07090752" SR0603 8390,5810 r90 bottom
R2378 "07090752" SR0603 8910,6940 r270 top
R2379 "07090924" SR0603 7625,5430 r0 bottom
R2380 "07090534" sr0805 4910,7070 r270 top
R2381 "07090534" sr0805 5230,6050 r90 top
R2382 "07090534" sr0805 4580,7200 r0 top
R2383 "07090537" sr0805 7610,5010 r180 top
R2384 "07090725" sr0805 6500,6560 r90 bottom
R2385 "07090725" sr0805 7570,6940 r90 bottom
R2386 "07090725" sr0805 7200,6940 r90 bottom
R2387 "07090725" sr0805 6860,6950 r90 bottom
R2388 "07090725" sr0805 6520,6930 r90 bottom
R2389 "07090725" sr0805 6190,6930 r90 bottom
R2390 "07090725" sr0805 5830,6930 r90 bottom
R2391 "07090725" sr0805 6840,6560 r90 bottom
R2392 "07090725" sr0805 7200,6560 r90 bottom
R2393 "07090725" sr0805 7480,6530 r90 bottom
R2394 "07090725" sr0805 5820,6560 r90 bottom
R2395 "07090725" sr0805 6180,6560 r90 bottom
R2396 "07090777" SR0603 6274.92,6770 r270 top
R2397 "07090777" SR0603 5920,6770 r270 top
R2398 "07090777" SR0603 7460,6260 r270 top
R2399 "07090777" SR0603 7240,6260 r270 top
R2404 "07090777" SR0603 7550,6770 r270 top
R2405 "07090777" SR0603 7130,6920 r90 top
R2406 "07090777" SR0603 6930,6770 r270 top
R2407 "07090777" SR0603 6580,6770 r270 top
R2408 "07090686" SR0603 8360,2950 r180 top
R2409 "07090777" SR0603 6930,6260 r270 top
R2413 "07090554" sr0805 8370,2740 r180 top
R2414 "07090225" sr0805 4040,4500 r270 bottom
R2415 "07090534" sr0805 3930,4230 r270 bottom
R2416 "07090534" sr0805 2338,4010 r90 top
R2499 "07090072" sr1206 4760,4630 r90 bottom
R2500 "07090554" sr0805 790,6830 r270 bottom
R2501 "07090554" sr0805 890,7720 r90 bottom
R2502 "07090534" sr0805 960,7390 r270 bottom
R2503 "07090534" sr0805 3850,4220 r270 top
R2504 "07090035" sr0805 1060,7720 r270 bottom
R2505 "07090035" sr0805 1090,7390 r90 bottom
R2506 "07090035" sr0805 1090,7020 r90 bottom
R2507 "07090035" sr0805 3620,4230 r270 top
R2508 "07090780" sr0805 3730,2790 r0 top
R2509 "07090780" sr0805 3570,2790 r0 top
R2510 "07090263" SR0603 1930,4140 r90 top
R2511 "07090549" sr0805 8080,4430 r0 bottom
R2512 "07090263" SR0603 10290,5870 r90 bottom
R2513 "07090263" SR0603 10160,6180 r90 top
R2516 "07090522" SR0603 2760,6830 r0 top
R2518 "07090522" SR0603 3230,7330 r0 top
R2519 "07090522" SR0603 2760,7330 r0 top
R2520 "07090535" sr0805 7800,5115 r90 top
R2521 "07090947" SR0603 7490,5170 r270 top
R2522 "07090686" SR0603 1520,1300 r0 top
R2523 "07090686" SR0603 3080,5640 r270 top
R2524 "07090686" SR0603 2280,4600 r270 top
R2525 "07090686" SR0603 2050,4600 r270 top
R2526 "07090686" SR0603 2750,5640 r270 top
R2527 "07090686" SR0603 2970,4600 r270 top
R2528 "07090686" SR0603 1780,5640 r270 top
R2529 "07090686" SR0603 1350,5640 r270 top
R2530 "07090686" SR0603 2690,4600 r270 top
R2531 "07090686" SR0603 2360,5640 r270 top
R2532 "07090686" SR0603 1970,5640 r270 top
R2533 "07090686" SR0603 8820,7510 r90 bottom
R2534 "07090686" SR0603 1410,3820 r90 top
R2535 "07090686" SR0603 1400,4600 r270 top
R2536 "07090686" SR0603 1620,4600 r270 top
R2537 "07090231" sr0805 2430,3270 r180 bottom
R2538 "07090231" sr0805 1960,3270 r180 bottom
R2539 "07090231" sr0805 2220,3270 r0 bottom
R2540 "07090231" sr0805 1410,3980 r270 top
R2541 "07090231" sr0805 8910,7680 r270 bottom
R2542 "07090534" sr0805 2440,2880 r90 bottom
R2543 "07090534" sr0805 1740,2880 r90 bottom
R2544 "07090534" sr0805 2055,2880 r90 bottom
R2545 "07090534" sr0805 1410,3640 r90 top
R2546 "07090534" sr0805 8920,7510 r90 bottom
R2547 "07091137" SR0603 7860,3830 r270 top
R2548 "07091137" SR0603 7690,3830 r90 top
R2549 "07091137" SR0603 7430,3840 r270 top
R2550 "07091137" SR0603 7260,3840 r90 top
R2551 "07090035" sr0805 7580,4300 r90 top
R2552 "07090035" sr0805 7220,4300 r90 top
R2553 "07090035" sr0805 9040,7340 r270 bottom
R2554 "07090035" sr0805 1410,3480 r270 top
R2555 "07090035" sr0805 2400,2700 r0 bottom
R2556 "07090035" sr0805 1700,2695 r180 bottom
R2557 "07090035" sr0805 2130,2700 r0 bottom
R2558 "07090780" sr0805 8195,6550 r90 bottom
R2559 "07090780" sr0805 7910,7740 r90 bottom
R2560 "07090780" sr0805 8165,7675 r180 top
R2561 "07090780" sr0805 8470,6780 r270 top
R2562 "07090779" sr0805 7380,5580 r270 bottom
R2563 "07090779" sr0805 5680,6050 r90 bottom
R2564 "07090779" sr0805 7860,4010 r270 top
R2565 "07090779" sr0805 7430,3980 r270 top
R2566 "07091130" sr0805 7390,4180 r90 bottom
R2567 "07091130" sr0805 7320,4180 r90 bottom
R2568 "07091130" sr0805 7720,4260 r0 top
R2569 "07091130" sr0805 7680,4180 r90 bottom
R2570 "07091130" sr0805 7300,4300 r270 top
R2571 "07091130" sr0805 7250,4180 r90 bottom
R2572 "07091130" sr0805 7610,4180 r90 bottom
R2573 "07091130" sr0805 7750,4180 r90 bottom
R2574 "07090378" SR0603 4560,3420 r270 bottom
R2575 "07090378" SR0603 3890,6240 r90 bottom
R2576 "07090378" SR0603 3020,6180 r90 bottom
R2577 "07090378" SR0603 5150,3460 r90 bottom
R2578 "07090378" SR0603 5250,3790 r90 bottom
R2579 "07090378" SR0603 4430,6030 r270 bottom
R2580 "07090378" SR0603 4320,3420 r270 bottom
R2581 "07090378" SR0603 4510,3630 r90 bottom
R2582 "07090378" SR0603 4150,3630 r90 bottom
R2583 "07090768" SR0603 4480,6190 r270 bottom
R2584 "07090768" SR0603 3280,6445 r0 bottom
R2585 "07090768" SR0603 4150,3300 r270 bottom
R2586 "07090768" SR0603 4710,3630 r90 bottom
R2587 "07090768" SR0603 4380,3630 r270 bottom
R2588 "07090768" SR0603 4930,3310 r270 bottom
R2589 "07090768" SR0603 4820,3790 r270 bottom
R2590 "07090768" SR0603 3980,6380 r90 bottom
R2591 "07090768" SR0603 5080,3300 r270 bottom
R2592 "07090233" sr0805 7460,7570 r270 top
R2593 "07090233" sr0805 7110,7570 r270 top
R2594 "07090233" sr0805 6760,7570 r270 top
R2595 "07090233" sr0805 6350,7420 r90 bottom
R2596 "07090233" sr0805 6440,7610 r270 top
R2597 "07090233" sr0805 5190,6250 r90 bottom
R2598 "07090233" sr0805 4640,7260 r270 bottom
R2599 "07090233" sr0805 8540,6100 r270 top
R2600 "07090233" sr0805 8790,7000 r180 bottom
R2601 "07090233" sr0805 4910,7070 r270 bottom
R2602 "07090233" sr0805 6000,7410 r0 bottom
R2603 "07090233" sr0805 6760,7390 r90 top
R2604 "07090233" sr0805 7110,7390 r90 top
R2605 "07090233" sr0805 7460,7390 r90 top
R2606 "07090233" sr0805 5790,7450 r270 top
R2607 "07090233" sr0805 6100,7450 r270 top
R2608 "07090233" sr0805 6440,7420 r90 top
R2609 "07090776" SR0603 2420,3140 r0 bottom
R2610 "07090776" SR0603 1950,3140 r0 bottom
R2611 "07090776" SR0603 2220,3140 r180 bottom
R2612 "07090124" sr0805 5010,3310 r270 bottom
R2613 "07090124" sr0805 3980,6240 r270 bottom
R2614 "07090124" sr0805 3180,6190 r270 bottom
R2615 "07090124" sr0805 5220,3300 r270 bottom
R2616 "07090124" sr0805 4900,3790 r270 bottom
R2617 "07090124" sr0805 4410,6190 r270 bottom
R2618 "07090124" sr0805 4150,3440 r90 bottom
R2619 "07090124" sr0805 4640,3620 r270 bottom
R2620 "07090124" sr0805 4310,3620 r270 bottom
R2621 "07090638" SR0603 4560,3300 r90 bottom
R2622 "07090638" SR0603 3810,6240 r90 bottom
R2623 "07090638" SR0603 3080,6180 r90 bottom
R2624 "07090638" SR0603 5080,3460 r270 bottom
R2625 "07090638" SR0603 5310,3790 r90 bottom
R2626 "07090638" SR0603 4500,6030 r270 bottom
R2627 "07090638" SR0603 4390,3420 r270 bottom
R2628 "07090638" SR0603 4450,3630 r90 bottom
R2629 "07090638" SR0603 4150,3790 r270 bottom
R2644 "07090263" SR0603 2210,4600 r90 top
R2645 "07090263" SR0603 2860,4370 r270 bottom
R2646 "07090263" SR0603 1560,4600 r90 top
R2647 "07090231" sr0805 820,6630 r270 top
R2648 "07090534" sr0805 820,6480 r90 top
R2649 "07090534" sr0805 690,6840 r90 top
R2650 "07090035" sr0805 620,6840 r270 top
R2651 "07090035" sr0805 900,6480 r90 top
R2652 "07090035" sr0805 970,6840 r270 top
R2653 "07090686" SR0603 10100,6230 r90 bottom
R2654 "07090686" SR0603 9740,6190 r90 top
R2655 "07090686" SR0603 8720,5600 r90 bottom
R2656 "07090686" SR0603 8940,5600 r90 bottom
R2657 "07090686" SR0603 8780,4210 r90 bottom
R2658 "07090686" SR0603 8850,4790 r90 bottom
R2659 "07090686" SR0603 10010,4280 r90 bottom
R2660 "07090686" SR0603 10070,4810 r90 bottom
R2661 "07090686" SR0603 9420,5660 r90 bottom
R2662 "07090686" SR0603 9570,5660 r90 bottom
R2663 "07090686" SR0603 9290,4190 r90 bottom
R2664 "07090686" SR0603 9640,4660 r270 bottom
R2665 "07090686" SR0603 10420,5560 r90 top
R2666 "07090686" SR0603 9910,5670 r90 bottom
R2667 "07090033" sr1206 2040,4740 r270 bottom
R2668 "07090033" sr1206 1770,5570 r90 bottom
R2669 "07090033" sr1206 2240,5560 r90 bottom
R2670 "07090033" sr1206 2830,5540 r90 bottom
R2671 "07090033" sr1206 3050,4580 r90 bottom
R2672 "07090033" sr1206 3190,5530 r90 bottom
R2673 "07090033" sr1206 2480,4580 r90 bottom
R2674 "07090033" sr1206 2830,4580 r90 bottom
R2675 "07090033" sr1206 1660,4770 r270 bottom
R2676 "07090033" sr1206 1760,4770 r270 bottom
R2677 "07090033" sr1206 2450,5560 r90 bottom
R2678 "07090033" sr1206 1610,5570 r90 bottom
R2679 "07090033" sr1206 1490,4550 r90 bottom
R2680 "07090033" sr1206 1600,4550 r90 bottom
R2681 "07090033" sr1206 9500,6070 r90 bottom
R2682 "07090033" sr1206 9610,6070 r90 bottom
R2683 "07090033" sr1206 10110,6070 r90 bottom
R2684 "07090033" sr1206 10010,6070 r90 bottom
R2685 "07090033" sr1206 8960,5440 r90 bottom
R2686 "07090033" sr1206 9060,5440 r90 bottom
R2687 "07090033" sr1206 8720,5440 r90 bottom
R2688 "07090033" sr1206 8820,5440 r90 bottom
R2689 "07090033" sr1206 10140,4600 r90 bottom
R2690 "07090033" sr1206 10240,4600 r90 bottom
R2691 "07090033" sr1206 9970,3970 r90 bottom
R2692 "07090033" sr1206 10070,3970 r90 bottom
R2693 "07090033" sr1206 8910,4630 r90 bottom
R2694 "07090033" sr1206 8800,4630 r90 bottom
R2695 "07090033" sr1206 8850,4040 r90 bottom
R2696 "07090033" sr1206 8750,4040 r90 bottom
R2697 "07090033" sr1206 10180,5590 r90 top
R2698 "07090033" sr1206 10280,5590 r90 top
R2699 "07090033" sr1206 9690,5500 r90 bottom
R2700 "07090033" sr1206 9590,5500 r90 bottom
R2701 "07090033" sr1206 10040,5590 r90 top
R2702 "07090033" sr1206 9930,5590 r90 top
R2703 "07090033" sr1206 9360,5500 r90 bottom
R2704 "07090033" sr1206 9460,5500 r90 bottom
R2705 "07090033" sr1206 9490,4670 r90 bottom
R2706 "07090033" sr1206 9380,4670 r90 bottom
R2707 "07090033" sr1206 9320,4020 r90 bottom
R2708 "07090033" sr1206 9420,4020 r90 bottom
R2709 "07090601" SR0603 670,4410 r90 top
R2710 "07090601" SR0603 550,3855 r270 top
R2711 "07090601" SR0603 730,4410 r90 top
R2712 "07090601" SR0603 790,4410 r90 top
R2713 "07090581" sr0805 890,4150 r270 top
R2714 "07090581" sr0805 820,3840 r90 top
R2715 "07090581" sr0805 750,3840 r90 top
R2716 "07090299" sr0805 590,5075 r90 top
R2717 "07090299" sr0805 525,3110 r90 top
R2718 "07090299" sr0805 580,5575 r90 top
R2719 "07090299" sr0805 395,3440 r180 bottom
R2720 "07090246" SR0603 610,3855 r90 top
R2721 "07090753" SR0603 770,2620 r90 top
R2722 "07090753" SR0603 780,3110 r90 top
R2723 "07090753" SR0603 690,4560 r90 top
R2724 "07090753" SR0603 835,5070 r90 top
R2725 "07090686" SR0603 770,5765 r270 bottom
R2726 "07090700" SR0603 835,5765 r90 bottom
R2727 "07090700" SR0603 790,6065 r90 bottom
R2728 "07090603" SR0603 4245,445 r0 bottom
R2729 "07090603" SR0603 4060,445 r0 bottom
R2730 "07090603" SR0603 3855,760 r180 bottom
R2731 "07090603" SR0603 3430,755 r0 bottom
R2732 "07090035" sr0805 905,5760 r90 bottom
R2733 "07090035" sr0805 710,6070 r90 bottom
R2734 "07090263" SR0603 8860,7705 r0 top
R2735 "07090263" SR0603 625,6265 r90 bottom
R2736 "07090700" SR0603 7410,5090 r270 bottom
R3000 "07090924" SR0603 5630,5700 r270 bottom
R3001 "07090924" SR0603 4615,5780 r0 top
R3002 "07090924" SR0603 4530,4880 r270 bottom
R3003 "07090761" SR0603 5430,5195 r180 bottom
R3004 "07090761" SR0603 4825,5600 r270 top
R3005 "07090761" SR0603 4535,4460 r90 bottom
R3006 "07090231" sr0805 3370,7550 r270 top
R3007 "07090231" sr0805 4000,3780 r270 top
R3008 "07090231" sr0805 3840,3780 r270 top
R3009 "07090299" sr0805 775,2850 r270 top
R3010 "07090299" sr0805 550,3440 r180 bottom
R3011 "07090601" SR0603 555,3620 r270 top
R3012 "07090601" SR0603 530,2620 r90 top
R3013 "07090601" SR0603 645,4560 r90 bottom
R3014 "07090601" SR0603 850,4410 r90 top
R3015 "07090299" sr0805 530,4800 r270 top
R3016 "07090299" sr0805 510,5345 r270 top
TP2 "14110100" TP40 7150,1120 r90 top
TP3 "14110100" TP40 7090,630 r90 top
TP4 "14110100" TP40 3570,2090 r0 top
TP5 "14110100" TP40 8710,2410 r0 top
TP6 "14110100" TP40 8740,1970 r0 top
TP7 "14110100" TP40 2820,2350 r0 top
TP8 "14110100" TP40 2820,2200 r0 top
TP9 "14110100" TP40 3350,6240 r0 top
TP10 "14110100" TP40 10520,7045 r0 top
TP11 "14110100" TP40 950,5320 r0 top
TP12 "14110100" TP40 5370,4250 r0 top
TP15 "14110100" TP40 5280,4930 r90 top
TP18 "14110100" TP40 6430,4730 r0 top
TP21 "14110100" TP40 6420,4580 r0 top
TP24 "14110100" TP40 6410,5910 r0 top
TP27 "14110100" TP40 6120,4050 r0 top
TP30 "14110100" TP40 10240,6740 r0 top
TP34 "14110100" TP40 9940,6740 r0 top
TP35 "14110100" TP40 690,6630 r0 top
TP36 "14110100" TP40 1930,2820 r0 top
TP37 "14110100" TP40 2570,2830 r0 top
TP38 "14110100" TP40 1530,2830 r0 top
TP39 "14110100" TP40 2170,2850 r0 top
TP40 "14110100" TP40 10050,2620 r0 top
TP41 "14110100" TP40 10210,2620 r0 top
TP56 "14110100" TP40 9890,2620 r0 top
TP57 "Comment" ict-smd40 6215,5570 r0 bottom
TP58 "Comment" ict-smd40 6030,6465 r0 bottom
TP59 "Comment" ict-smd40 6270,6410 r0 bottom
TP60 "Comment" ict-smd40 5855,7400 r0 bottom
TP61 "Comment" ict-smd40 6860,7085 r0 bottom
TP62 "Comment" ict-smd40 7225,7100 r0 bottom
TP64 "Comment" ict-smd40 8095,4325 r0 bottom
TP65 "Comment" ict-smd40 7610,6475 r0 bottom
TP71 "Comment" ict-smd40 4990,5055 r0 bottom
TP79 "Comment" ict-smd40 6330,6290 r0 bottom
TP80 "Comment" ict-smd40 5850,6330 r0 bottom
TP81 "Comment" ict-smd40 6380,6980 r0 bottom
TP82 "Comment" ict-smd40 5715,7595 r0 bottom
TP84 "Comment" ict-smd40 6765,4745 r0 bottom
TP92 "Comment" ict-smd40 8365,7635 r0 bottom
TP93 "Comment" ict-smd40 585,6015 r0 bottom
TP94 "Comment" ict-smd40 285,6015 r0 bottom
TP97 "Comment" ict-smd40 5530,5800 r0 bottom
TP98 "Comment" ict-smd40 5635,5505 r0 bottom
TP99 "Comment" ict-smd40 5255,5250 r0 bottom
TP101 "Comment" ict-smd40 4100,4345 r0 bottom
TP102 "Comment" ict-smd40 4395,4995 r0 bottom
TP103 "Comment" ict-smd40 4880,4595 r0 bottom
TP104 "Comment" ict-smd40 8185,5805 r0 bottom
TP105 "Comment" ict-smd40 7880,6035 r0 bottom
TP106 "Comment" ict-smd40 7475,5480 r0 bottom
TP107 "Comment" ict-smd40 5140,6105 r0 bottom
TP108 "Comment" ict-smd40 3840,7475 r0 bottom
TP110 "Comment" ict-smd40 3865,4485 r0 bottom
TP111 "Comment" ict-smd40 9885,4915 r0 bottom
TP113 "Comment" ict-smd40 10285,5070 r0 bottom
TP114 "Comment" ict-smd40 3270,6770 r0 bottom
TP115 "Comment" ict-smd40 3585,6735 r0 bottom
TP116 "Comment" ict-smd40 1060,1545 r0 bottom
TP117 "Comment" ict-smd40 3680,6970 r0 bottom
TP118 "Comment" ict-smd40 3760,4950 r0 bottom
TP126 "Comment" ict-smd40 7750,7440 r0 bottom
TP128 "Comment" ict-smd40 8495,4820 r0 bottom
TP129 "Comment" ict-smd40 8465,4735 r0 bottom
TP130 "Comment" ict-smd40 8455,5335 r0 bottom
TP131 "Comment" ict-smd40 8455,5200 r0 bottom
TP132 "Comment" ict-smd40 8530,4545 r0 bottom
TP133 "Comment" ict-smd40 8450,4600 r0 bottom
TP137 "Comment" ict-smd40 9240,4960 r0 bottom
TP138 "Comment" ict-smd40 9275,5055 r0 bottom
TP139 "Comment" ict-smd40 9875,4625 r0 bottom
TP140 "Comment" ict-smd40 10020,4465 r0 bottom
TP141 "Comment" ict-smd40 9810,5155 r0 bottom
TP142 "Comment" ict-smd40 9795,4925 r0 bottom
TP143 "Comment" ict-smd40 9720,4980 r0 bottom
TP144 "Comment" ict-smd40 8010,4330 r0 bottom
TP145 "Comment" ict-smd40 10240,4930 r0 bottom
TP146 "Comment" ict-smd40 10345,4855 r0 bottom
TP148 "Comment" ict-smd40 10120,3820 r0 bottom
TP154 "Comment" ict-smd40 9575,4170 r0 bottom
TP155 "Comment" ict-smd40 9180,5215 r0 bottom
TP158 "Comment" ict-smd40 10210,7440 r0 bottom
TP159 "Comment" ict-smd40 9765,7295 r0 bottom
TP160 "Comment" ict-smd40 9625,7685 r0 bottom
TP161 "Comment" ict-smd40 9755,7145 r0 bottom
TP162 "Comment" ict-smd40 895,7120 r0 bottom
TP163 "Comment" ict-smd40 7540,4695 r0 bottom
TP164 "Comment" ict-smd40 7730,4510 r0 bottom
TP165 "Comment" ict-smd40 7870,4960 r0 bottom
TP166 "Comment" ict-smd40 740,6720 r0 bottom
TP167 "Comment" ict-smd40 970,7675 r0 bottom
TP168 "Comment" ict-smd40 1135,7195 r0 bottom
TP169 "Comment" ict-smd40 9510,7115 r0 bottom
TP171 "Comment" ict-smd40 10190,7055 r0 bottom
TP172 "Comment" ict-smd40 8995,6160 r0 bottom
TP173 "Comment" ict-smd40 8520,6080 r0 bottom
TP174 "Comment" ict-smd40 9970,7440 r0 bottom
TP175 "Comment" ict-smd40 10490,7345 r0 bottom
TP176 "Comment" ict-smd40 10345,7680 r0 bottom
TP177 "Comment" ict-smd40 10430,7050 r0 bottom
TP178 "Comment" ict-smd40 10400,7440 r0 bottom
TP181 "Comment" ict-smd40 6340,2905 r0 bottom
TP182 "Comment" ict-smd40 5395,3490 r0 bottom
TP183 "Comment" ict-smd40 3825,5715 r0 bottom
TP184 "Comment" ict-smd40 3595,3625 r0 bottom
TP185 "Comment" ict-smd40 490,7730 r0 bottom
TP186 "Comment" ict-smd40 490,7380 r0 bottom
TP187 "Comment" ict-smd40 940,980 r0 bottom
TP188 "Comment" ict-smd40 7325,375 r0 bottom
TP189 "Comment" ict-smd40 6315,3510 r0 bottom
TP190 "Comment" ict-smd40 1495,6965 r0 bottom
TP191 "Comment" ict-smd40 1525,6670 r0 bottom
TP192 "Comment" ict-smd40 1360,7640 r0 bottom
TP193 "Comment" ict-smd40 1285,7330 r0 bottom
TP194 "Comment" ict-smd40 1290,6940 r0 bottom
TP195 "Comment" ict-smd40 1120,6695 r0 bottom
TP196 "Comment" ict-smd40 880,6675 r0 bottom
TP197 "Comment" ict-smd40 1620,7640 r0 bottom
TP198 "Comment" ict-smd40 1555,7350 r0 bottom
TP199 "Comment" ict-smd40 5810,3545 r0 bottom
TP200 "Comment" ict-smd40 3030,510 r0 bottom
TP201 "Comment" ict-smd40 3320,615 r0 bottom
TP205 "Comment" ict-smd40 1285,960 r0 bottom
TP206 "Comment" ict-smd40 4505,2240 r0 bottom
TP207 "Comment" ict-smd40 4695,2240 r0 bottom
TP208 "Comment" ict-smd40 2400,1705 r0 bottom
TP209 "Comment" ict-smd40 3385,1045 r0 bottom
TP210 "Comment" ict-smd40 3030,1170 r0 bottom
TP211 "Comment" ict-smd40 6010,7970 r0 bottom
TP212 "Comment" ict-smd40 5705,7880 r0 bottom
TP213 "Comment" ict-smd40 6015,8060 r0 bottom
TP215 "Comment" ict-smd40 7330,7980 r0 bottom
TP216 "Comment" ict-smd40 7335,8085 r0 bottom
TP217 "Comment" ict-smd40 5815,7980 r0 bottom
TP218 "Comment" ict-smd40 7435,7985 r0 bottom
TP219 "Comment" ict-smd40 5815,8080 r0 bottom
TP220 "Comment" ict-smd40 745,2040 r0 bottom
TP221 "Comment" ict-smd40 530,1990 r0 bottom
TP222 "Comment" ict-smd40 4340,2275 r0 bottom
TP223 "Comment" ict-smd40 4790,2235 r0 bottom
TP224 "Comment" ict-smd40 3670,2215 r0 bottom
TP225 "Comment" ict-smd40 3960,2480 r0 bottom
TP226 "Comment" ict-smd40 4125,2480 r0 bottom
TP228 "Comment" ict-smd40 4040,4780 r0 bottom
TP229 "Comment" ict-smd40 1485,1225 r0 bottom
TP230 "Comment" ict-smd40 2130,1685 r0 bottom
TP231 "Comment" ict-smd40 1210,1105 r0 bottom
TP232 "Comment" ict-smd40 1590,960 r0 bottom
TP233 "Comment" ict-smd40 2715,1455 r0 bottom
TP234 "Comment" ict-smd40 3105,1050 r0 bottom
TP235 "Comment" ict-smd40 2945,1345 r0 bottom
TP236 "Comment" ict-smd40 2810,1510 r0 bottom
TP237 "Comment" ict-smd40 2845,1670 r0 bottom
TP238 "Comment" ict-smd40 2910,1530 r0 bottom
TP239 "Comment" ict-smd40 2650,1315 r0 bottom
TP240 "Comment" ict-smd40 3575,1670 r0 bottom
TP241 "Comment" ict-smd40 9180,5910 r0 bottom
TP245 "Comment" ict-smd40 1950,185 r0 bottom
TP247 "Comment" ict-smd40 915,7865 r0 bottom
TP248 "Comment" ict-smd40 1000,7900 r0 bottom
TP249 "Comment" ict-smd40 625,6700 r0 bottom
TP250 "Comment" ict-smd40 1560,2365 r0 bottom
TP251 "Comment" ict-smd40 9385,7820 r0 bottom
TP252 "Comment" ict-smd40 9575,6630 r0 bottom
TP254 "Comment" ict-smd40 9030,7980 r0 bottom
TP256 "Comment" ict-smd40 9280,7855 r0 bottom
TP258 "Comment" ict-smd40 9195,7815 r0 bottom
TP259 "Comment" ict-smd40 1185,6430 r0 bottom
TP260 "Comment" ict-smd40 1920,340 r0 bottom
TP261 "Comment" ict-smd40 1105,7840 r0 bottom
TP262 "Comment" ict-smd40 1030,970 r0 bottom
TP263 "Comment" ict-smd40 1245,7865 r0 bottom
TP264 "Comment" ict-smd40 1795,380 r0 bottom
TP265 "Comment" ict-smd40 1420,7875 r0 bottom
TP266 "Comment" ict-smd40 10350,6640 r0 bottom
TP267 "Comment" ict-smd40 10275,7800 r0 bottom
TP268 "Comment" ict-smd40 10445,6465 r0 bottom
TP269 "Comment" ict-smd40 10530,6465 r0 bottom
TP270 "Comment" ict-smd40 10260,6565 r0 bottom
TP271 "Comment" ict-smd40 10245,6660 r0 bottom
TP272 "Comment" ict-smd40 10495,6575 r0 bottom
TP273 "Comment" ict-smd40 915,1325 r0 bottom
TP274 "Comment" ict-smd40 3205,7980 r0 bottom